# Altium PCB PCB1.PcbDoc (part 3 of 5)
Units mm, origin at the board's own origin, x right, y up, seen from the top; angles counter-clockwise.
Board outline 200 x 110 mm, 4 copper layers (Top Layer, Power Layer, GND Layer, Bottom Layer), stack 1.714 mm thick; 627 components, 400 nets, 2020 pads, 570 vias.
Unrouted connection lines stored in the file: 110.
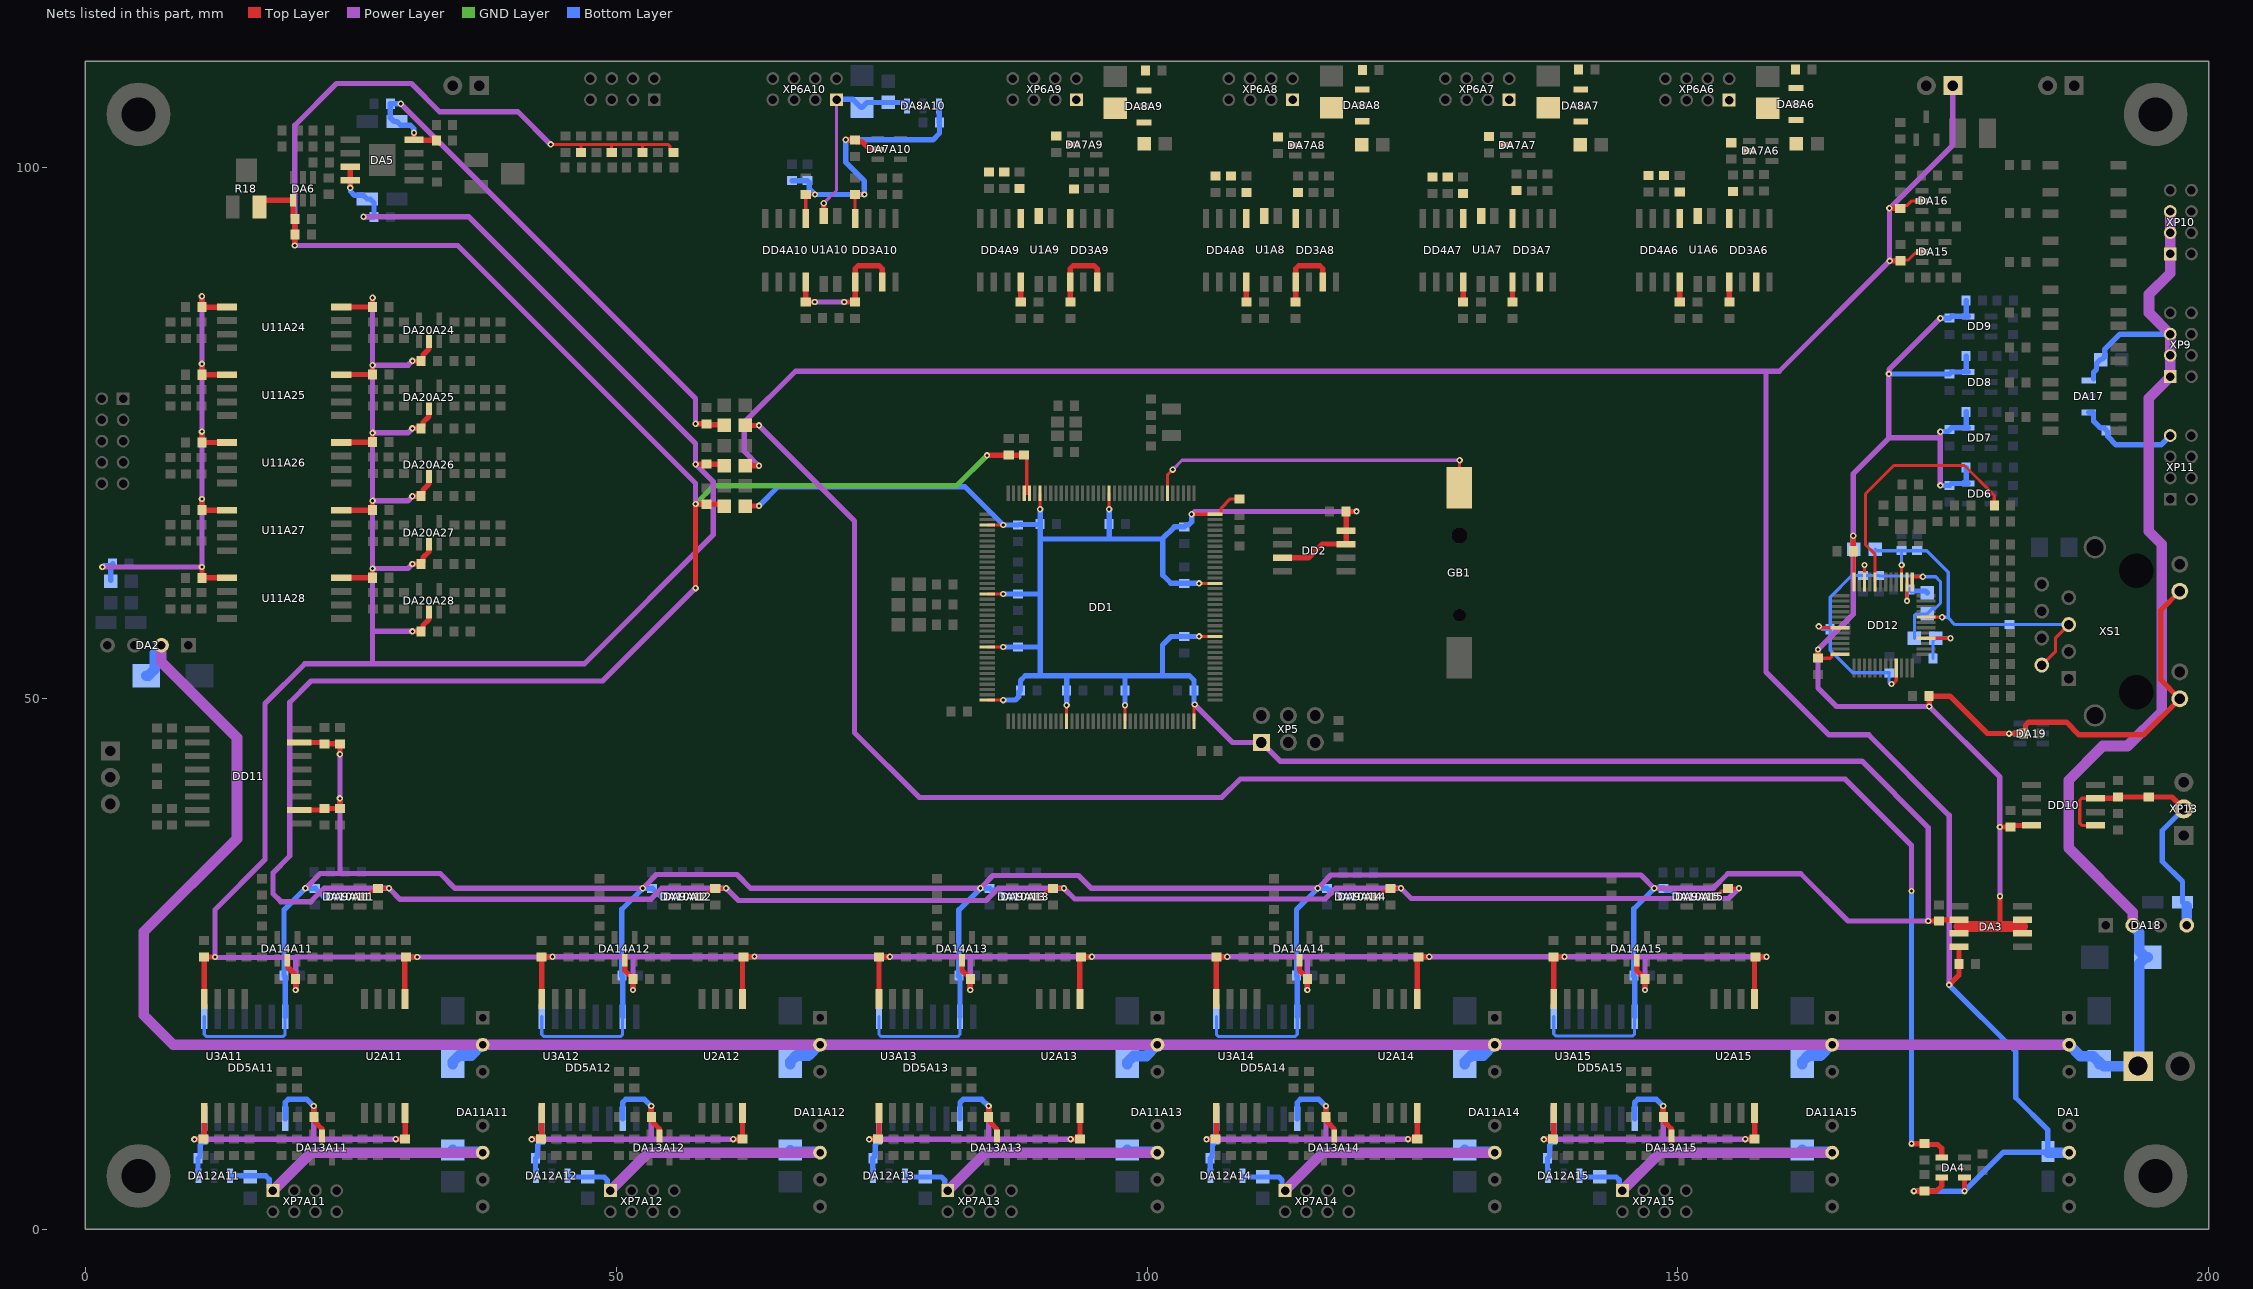
[diagram p4: the nets of this part, all layers, seen from the top]

## Via types
v1: diameter 0.6, hole 0.3, Top Layer to Bottom Layer, tented both sides, 557 vias
v2: diameter 0.6, hole 0.3, Top Layer to Bottom Layer, 12 vias
v3: diameter 0.5, hole 0.2, Top Layer to Bottom Layer, tented both sides, 1 vias

## Nets (pads, with @x,y where several pads share a name; then routed paths per layer and width w, separated by ;. In a path a pad name is that pad's centre, name@x,y a point inside that pad or via, vN(x,y) a via of type N, cw(c..) or ccw(c..) an arc to the next point about the centre after c; other vN are vias at no path point) (continued)
+24V: (continued)
  Bottom Layer w1: C2.1@5.75,52.119 5.925,52.119 6.525,52.719 6.525,54.251 7.16,54.886 DA2.2@7.16,54.994 ; C57A11.1@34.6,15.55 34.6,15.75 35.2,16.35 36.329,16.35 37.344,17.365 DA11A11.2@37.425,17.365 ; C57A12.1@66.375,15.55 66.375,15.75 66.975,16.35 68.104,16.35 69.119,17.365 DA11A12.2@69.2,17.365 ; C57A13.1@98.15,15.55 98.15,15.706 98.75,16.306 99.916,16.306 DA11A13.2@100.918,17.308 ; C57A14.1@129.925,15.55 129.925,15.75 130.525,16.35 131.654,16.35 132.669,17.365 DA11A14.2@132.75,17.365 ; C57A15.1@161.7,15.55 161.7,15.75 162.3,16.35 163.429,16.35 164.444,17.365 DA11A15.2@164.525,17.365 ; DA1.2@186.85,17.365 187.922,16.293 189.1,16.293 189.7,15.693 C1.1@189.7,15.55 ; C1.1@189.7,15.75 190.1,15.35 XP4.1@193.35,15.35 193.469,15.469 193.469,25 194.069,25.6 C91.1@194.25,25.6 ; DA18.2@192.845,28.625 192.845,28.517 193.45,27.912 193.45,26.2 C91.1@194.05,25.6
+VBAT: DD1.6 GB1.2 | length 32.4
  Top Layer w0.3: DD1.6@101.925,69.3 101.925,71.05 v1(102.411,71.536) ; GB1.2@129.425,69.825 129.438,69.838 v1(129.438,72.413)
  Power Layer w0.3: v1(102.411,71.536) 103.288,72.413 v1(129.438,72.413)
-5V: C15.1 DA4.1 L4.1 | length 171.3
  Top Layer w0.5: L4.1@62.175,75.7 v1(63.45,75.7) ; v1(172,8.05) 173.15,8.05 173.225,7.975 174.477,7.975 174.85,7.602 DA4.1@174.85,6.75
  Power Layer w0.5: v1(63.45,75.7) 72.45,66.7 72.45,46.75 78.55,40.65 107.025,40.65 108.775,42.4 165.75,42.4 167.5,40.65 172,36.15 v1(172,31.85)
  Bottom Layer w0.5: v1(172,8.05) v1(172,31.85)
-5VA: C21.1 C37.2 C38.1 DA5.4 L4.2 R12.1 | length 52.5
  Top Layer w0.5: v1(30.95,103.275) DA5.4@30.95,102.6 30.975,102.575 33.025,102.575 R12.1@33.05,102.55 ; v1(57.475,75.85) C21.1@58.5,75.85 58.575,75.775 60.1,75.775 L4.2@60.175,75.7
  Power Layer w0.5: v1@29.719,105.981 57.475,78.225 v1(57.475,75.85)
  Bottom Layer w0.5: v1(29.7,106) C38.1@28.725,106 28.725,104.675 29.075,104.325 C37.2@29.35,104.325 29.7,103.975 30.607,103.975 30.931,103.651 30.931,103.294 v1(30.95,103.275)
ACTn: DD12.20 R71.2 | length 24
  Top Layer w0.3: DD12.20@168.575,60.951 168.575,63.55 167.675,64.45 167.675,69.25 170.35,71.925 177,71.925 179.8,69.125 R71.2@179.8,68.162